# Altium PCB coin_boost_cell.PcbDoc
Units mm, origin at the board's own origin, x right, y up, seen from the top; angles counter-clockwise.
Board outline 11.43 x 11.43 mm, 2 copper layers (Top Layer, Bottom Layer); 10 components, 4 nets, 20 pads, 4 vias.
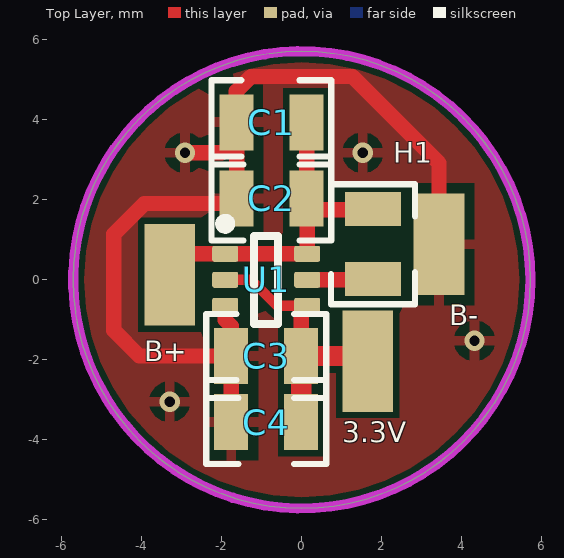
[diagram p0: Top Layer view]
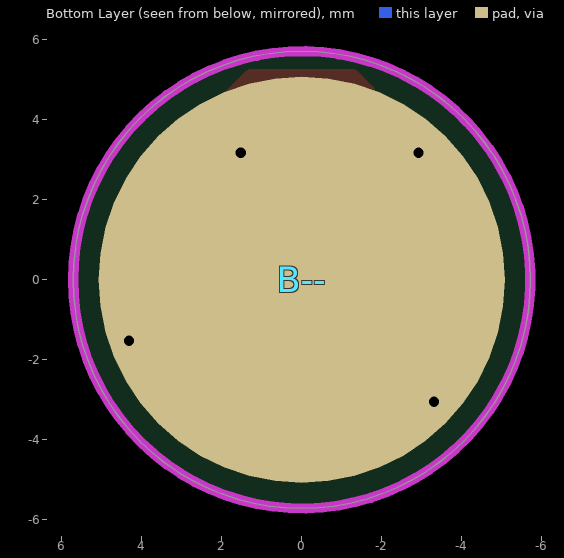
[diagram p1: Bottom Layer view, seen from below]
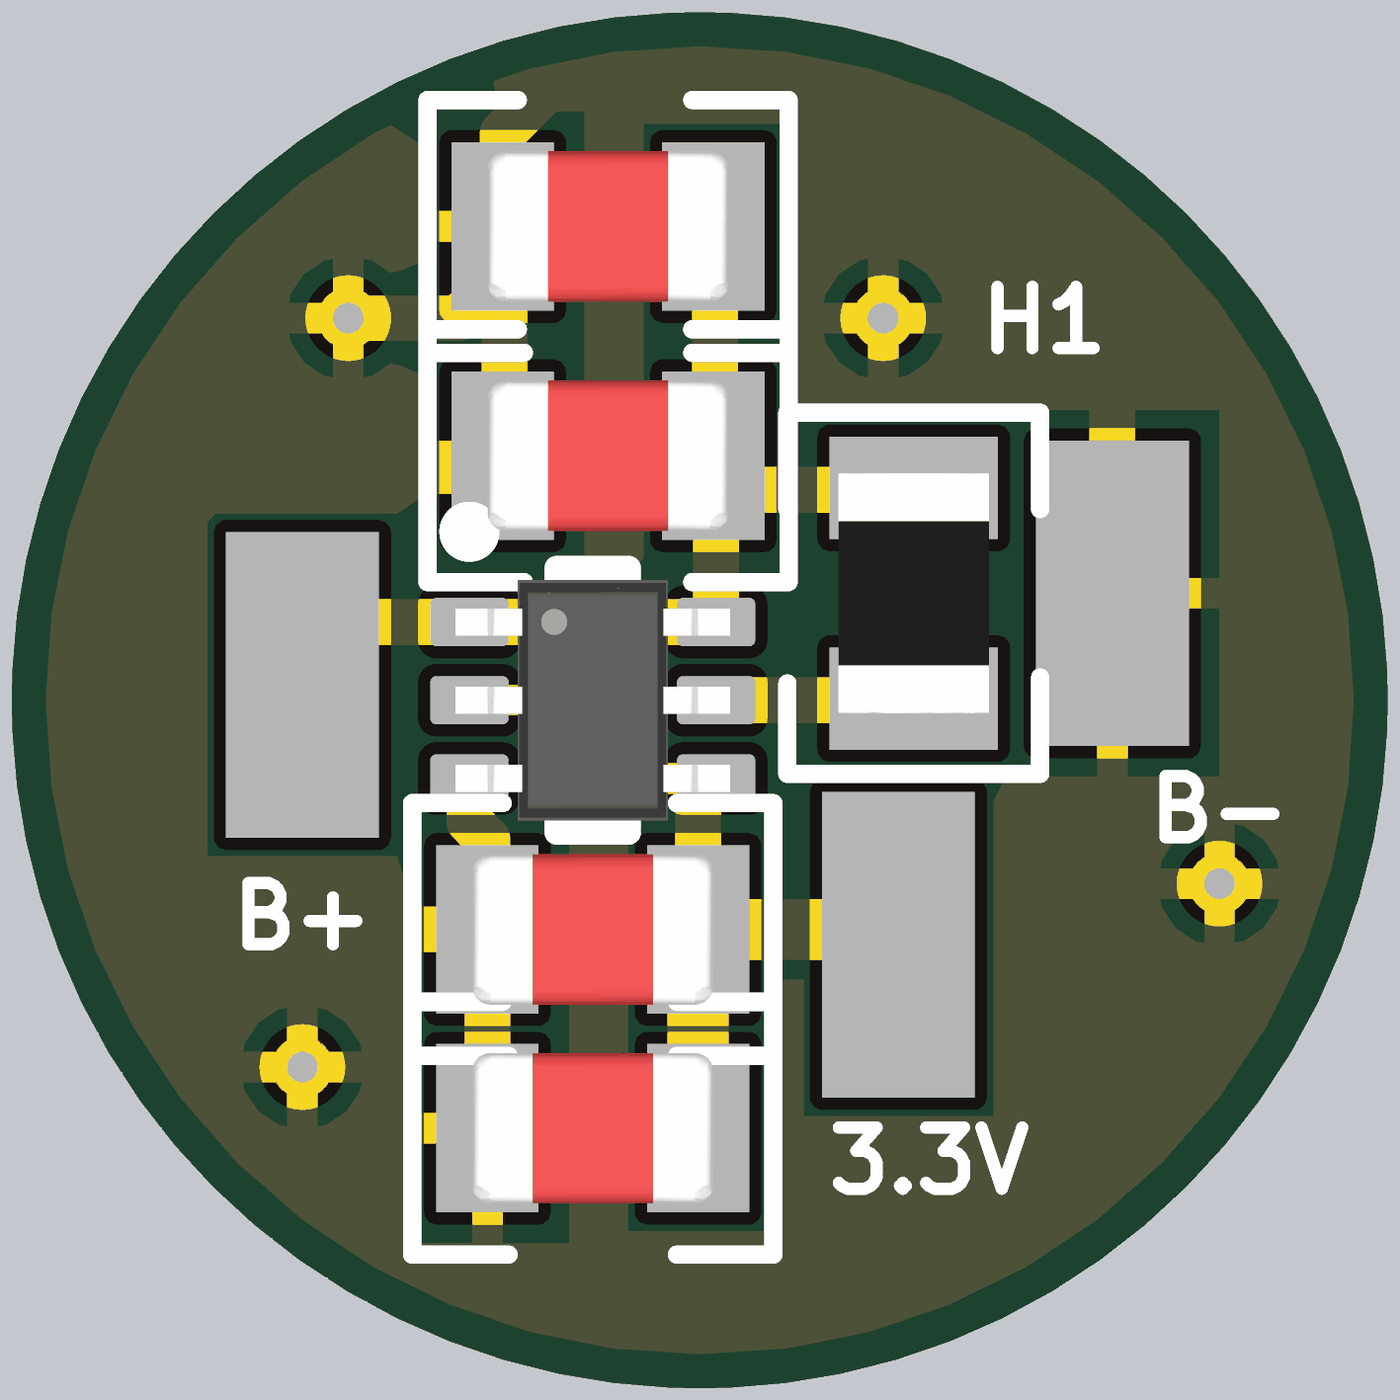
[diagram p2: 3D render of the assembled board from above, using the file's embedded part models]

## Layer stack, top to bottom
Top Solder: solder mask 0.0102, Solder Resist, Dk 3.5
Top Layer: signal copper 0.0356
Dielectric 1: dielectric 0.32, FR-4, Dk 4.8
Bottom Layer: signal copper 0.0356
Bottom Solder: solder mask 0.0102, Solder Resist, Dk 3.5

## Board outline
-5.715,0 ccw(c0,0) 0,-5.715 ccw(c0,0) 5.715,0 ccw(c0,0) 0,5.715 ccw(c0,0)

## Design rules (kind name [scope] priority, off if disabled: settings)
Clearance [All] p1: gap=0.152
PolygonConnect [All] p1: connectstyle=Relief reliefconductorwidth=0.254 reliefentries=4 polygonreliefangle="90 Angle" airgapwidth=0.254
RoutingVias [All] p1: holewidth=0.711 width=1.27 viastyle="Through Hole" minholewidth=0.711 minwidth=1.27 maxholewidth=0.711 maxwidth=1.27
SolderMaskExpansion [All] p1: expansion=0.102
Width [All] p1: maxlimit=1.27 minlimit=0.254 preferedwidth=0.381
30 further rules are at their usual default settings.

## Components (designator, comment, footprint, x,y, rotation, side; value= is the part's Value field where it differs from the comment)
3.3V "boost_coin_smd_wire" SMD_PIN 1.651,-2.032 r0 top
B+ "boost_coin_smd_wire" SMD_PIN -3.302,0.127 r180 top
B- "boost_coin_smd_wire" SMD_PIN 3.429,0.889 r0 top
B-- "boost_coin_smd_gnd" SMD_GND 0,0 r0 bottom
C1 "10uF" CAP-0805(2012)-R -0.762,3.937 r180 top
C2 "10uF" CAP-0805(2012)-R -0.762,2.032 r180 top
C3 "10uF" CAP-0805(2012)-R -0.889,-1.905 r180 top
C4 "10uF" CAP-0805(2012)-R -0.889,-3.556 r180 top
H1 "4.7uF" H-0805(2012)-H 1.778,0.889 r270 top
U1 "TPS61221DCKT" DCK0006A_L -0.889,0 r0 top

## Footprints (in the part's own frame and the unit in brackets; to place one, negate y for a bottom-side part, rotate by r counter-clockwise, add the part's x,y. Pads: shape width x height; smd on the part's side, far side on the other; paste and mask are expansions set on the pad)
CAP-0805(2012)-R [mm] "Capacitor 0805(2012) Reflow"
  rect 0.85x1.4 smd: 1(-0.875,0) 2(0.875,0)
  silkscreen extent -1.5,-1.05 1.5,1.05, body extent -1,-0.63 1,0.63, height 0.78
DCK0006A_L [mm] "SOT23, 6-Leads, Body 2.15x1.4mm, Pitch 0.65mm, IPC High Density"
  rrect25% 0.65x0.4 smd: 1(-1.025,0.65) 2(-1.025,0) 3(-1.025,-0.65) 4(1.025,-0.65) 5(1.025,0) 6(1.025,0.65)
  silkscreen extent -1.15,-1.1 0.3,1.52, body extent -1.14,-1 1.14,1, height 0.94
H-0805(2012)-H [mm] "Inductor 0805(2012) Reflow"
  rect 0.85x1.4 smd: 1(-0.875,0) 2(0.875,0)
  silkscreen extent -1.5,-1.05 1.5,1.05, body extent -1,-0.62 1,0.63, height 0.5
SMD_GND [mm]
  round 10.16 smd: 1(0,0)
SMD_PIN [mm]
  rect 1.27x2.54 smd: 1(0,0)

## Part data
C1 C2 C3 C4: library part C-0805(2012), "___ OHM ___ mW 0805(2012) SMD"
H1: library part H-0805(2012)
U1: library part CMP-0343-00080-2, "Boost Voltage Converter with 0.7 to 5.5 V Input and 3.3 V Output, -40 to 85 degC, 6-Pin SC70 (DCK), Green (RoHS & no Sb/Br)"

## Via types
v1: diameter 0.508, hole 0.254, Top Layer to Bottom Layer, 4 vias

## Nets (pads, with @x,y where several pads share a name; then routed paths per layer and width w, separated by ;. In a path a pad name is that pad's centre, name@x,y a point inside that pad or via, vN(x,y) a via of type N, cw(c..) or ccw(c..) an arc to the next point about the centre after c; other vN are vias at no path point)
Net3.3V_1: 3.3V.1 C3.1 C4.1 U1.2 U1.4 | length 7
  Top Layer w0.254: U1.2 -1.27,0 -0.62,-0.65 U1.4 ; 3.3V.1@1.524,-1.905 3.3V.1
  Top Layer w0.381: C3.1 -0.014,-0.8 U1.4
  Top Layer w0.508: C4.1 C3.1 3.3V.1@1.524,-1.905
NetB+_1: B+.1 C1.1 C2.1 H1.1 U1.1 U1.6 | length 8
  Top Layer w0.254: B+.1 B+.1@-2.779,0.65
  Top Layer w0.381: B+.1@-2.779,0.65 U1.1 U1.6 ; C1.1@0.127,3.556 0.127,1.914 C2.1@0.136,1.905 ; U1.6@0.136,0.777 C2.1@0.136,1.905 ; H1.1@1.651,1.75 0.291,1.75 C2.1@0.136,1.905
NetB-_1: B--.1 B-.1 C1.2 C2.2 C3.2 C4.2 U1.3 | length 24.8
  Top Layer w0.381: v1(-2.921,3.175) -2.004,3.175 C1.2@-1.623,3.556 ; U1.3 -1.914,-1.007 -1.764,-1.157 C3.2 ; C4.2 C3.2 ; C1.2 -1.637,4.713 -1.27,5.08 1.27,5.08 3.429,2.921 B-.1 ; C1.2@-1.623,4.346 C1.2@-1.623,3.556 ; C3.2 -4.064,-1.905 -4.699,-1.27 -4.699,1.143 -3.937,1.905 -1.623,1.905 C1.2@-1.623,3.556
  other v1: -3.302,-3.048 4.318,-1.524 1.524,3.175
NetH1_2: H1.2 U1.5 | length 1.5
  Top Layer w0.381: U1.5 H1.2@1.651,0

## Polygon pours and split planes (outlines as drawn)
NetB-_1 on Top Layer "GND Plane Top" (solid, remove dead copper, pour order 0): -6.35,6.096 -6.223,6.223 6.477,6.223 6.477,-6.223 6.604,-6.35 6.477,-6.477 -6.477,-6.477 -6.477,5.969 -6.35,6.096

## Keep-outs
Keep-Out Layer:
  circle w0.254: c0,0 r5.715

## Silkscreen, mask and mechanical layers (free items; w line width, h text height)
Mechanical 3:
  circle w0.254: c0,0 r5.715